# EAGLE board new_encorder_slave_ver_adachi_80x50 (EAGLE 6.4)
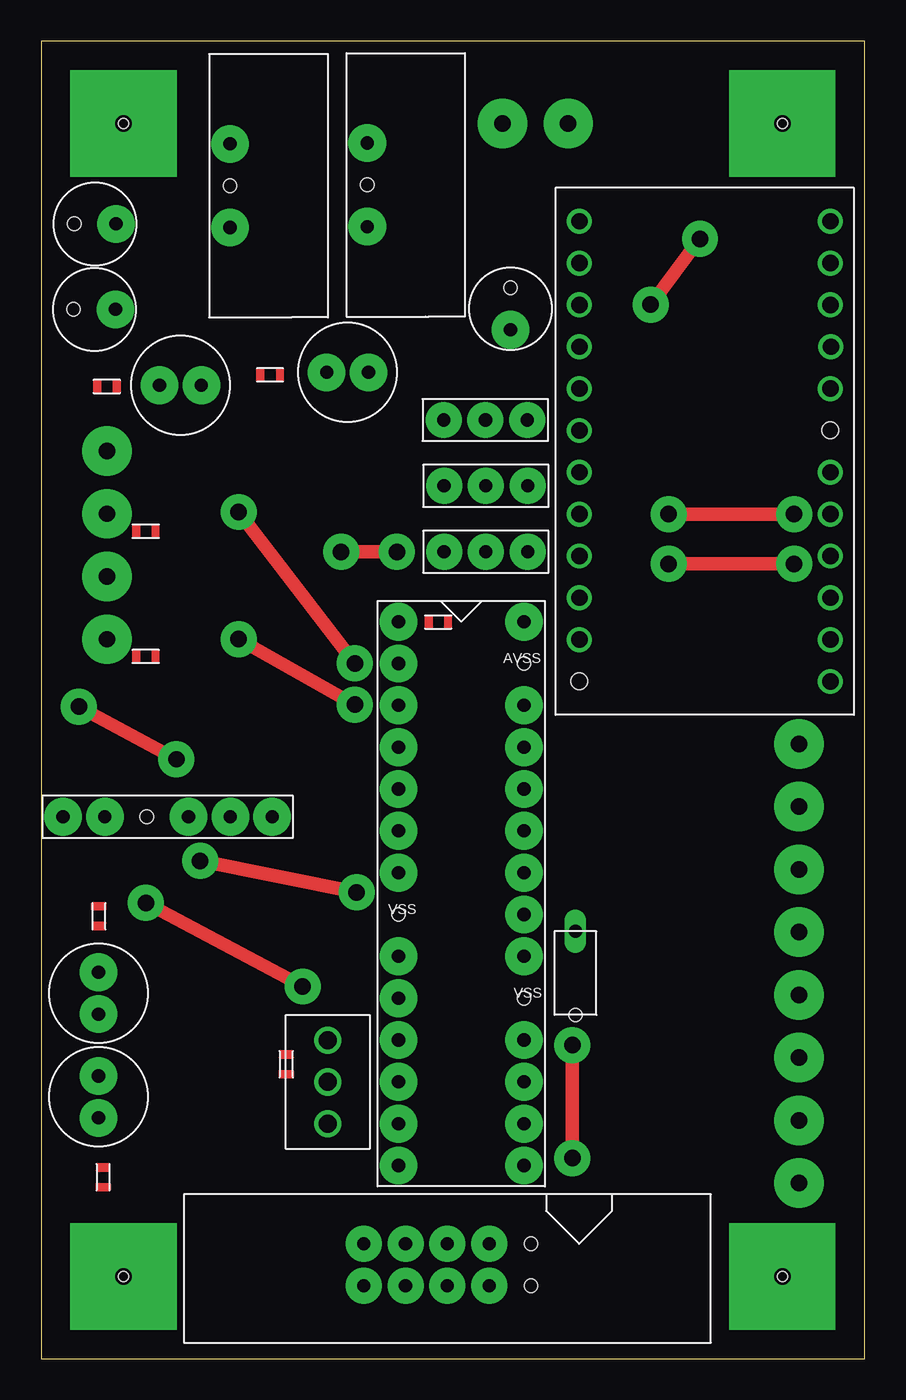
[diagram p0: board, top side]
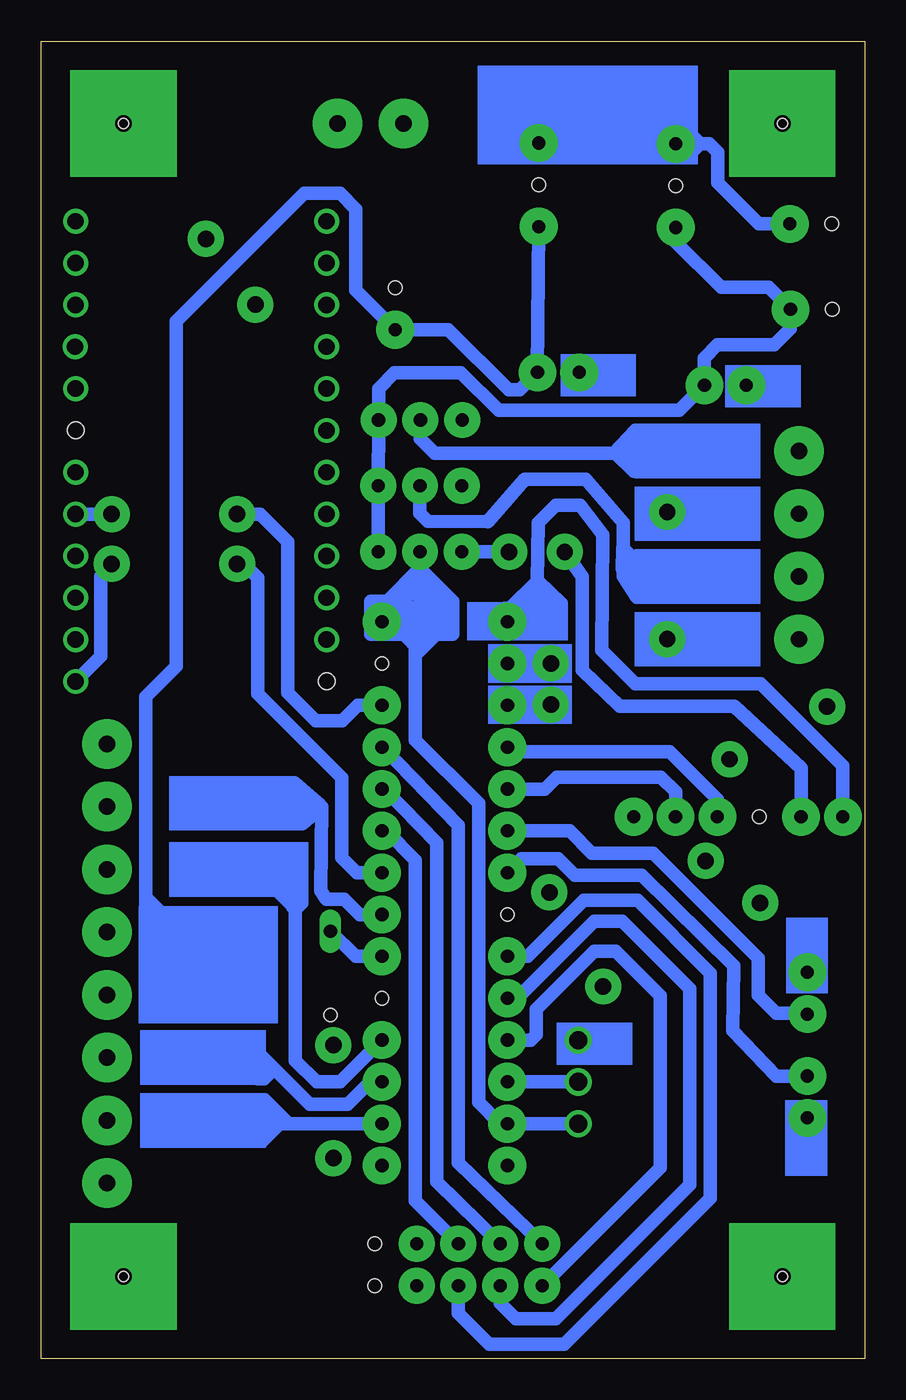
[diagram p1: board, bottom side, seen from below]

Size 50 x 80 mm. Coordinates in mm from the lower left corner, seen from the top.
Outline: 0,0 50,0 50,80 0,80 0,0
Copper layers (1*16): Top 0.035mm / dielectric 1.5mm / Bottom 0.035mm
Design rules "default": minimum track width 10mil, minimum drill 24mil, track to track 8mil, track to pad 8mil, pad to pad 8mil, via to via 8mil, smd to smd 8mil, copper to edge 40mil, drill to drill 8mil, minimum pad ring 10mil, minimum via ring 8mil, stop-mask expansion 4mil, vias tented up to drill 0mil, thermal gap 10mil
Holes 0.6 mm at 5,5 45,5 45,75 5,75

## Footprints (pad centres in the part's own frame; a part is rotated, then mirrored left to right if it is on the bottom)
PIC_28P_2 = drill 0.8 pad 2.3: AVDD 3.81,16.51; MCLR -3.81,16.51; RA0 -3.81,13.97; RA1 -3.81,11.43; RA2 -3.81,-3.81; RA3 -3.81,-6.35; RA4 -3.81,-8.89; RB0 -3.81,8.89; RB1 -3.81,6.35; RB2 -3.81,3.81; RB3 -3.81,1.27; RB4 -3.81,-11.43; RB5 -3.81,-16.51; RB6 3.81,-16.51; RB7 3.81,-13.97; RB8 3.81,-11.43; RB9 3.81,-8.89; RB10 3.81,-1.27; RB11 3.81,1.27; RB12 3.81,3.81; RB13 3.81,6.35; RB14 3.81,8.89; RB15 3.81,11.43; VCAP 3.81,-3.81; VDD -3.81,-13.97 | hole 0.8: -3.81,-1.27; 3.81,-6.35; 3.81,13.97
LED = drill 0.8 pad 2.286: P$1 -1.27,0; P$2 1.27,0
TOGGLE_SWITCH(3PIN) = drill 1.1: P$1 2.54,1.52; P$2 2.54,4.06; P$3 2.54,6.6
AE-UM232R = drill 1: 3LD 16.67,2.03; 3V3 16.67,17.27; CB0 16.67,27.43; CB1 16.67,24.89; CB2 1.43,2.03; CB3 16.67,14.73; CB4 1.43,4.57; CTS# 1.43,7.11; DCD# 1.4,9.65; DSR# 1.43,12.19; DTR# 1.43,27.43; PU1 16.67,12.19; PU2 16.67,9.65; RI# 1.43,17.27; RST 16.67,19.81; RTS# 1.43,24.89; RXD 1.43,19.81; TXD 1.43,29.97; USB 16.67,4.57; VCC 16.67,22.35; VCCC 16.67,7.11; VIO 1.43,22.35 | hole 1: 1.43,14.73; 16.67,29.97
RIBBON_CABLE = drill 0.8 pad 2.184: P$1 -5.08,0; P$2 -2.54,0; P$3 0,0; P$4 2.54,0; P$5 -5.08,-2.54; P$6 -2.54,-2.54; P$7 0,-2.54; P$8 2.54,-2.54 | hole 0.8: 5.08,0; 5.08,-2.54
REGULATOR = drill 0.8 pad 2.286: P$2 -2.54,1.27; P$3 2.54,1.27 | hole 0.8: 0,1.27
WRITER = drill 0.8 pad 2.286: P$1 -6.35,0; P$2 -3.81,0; P$4 1.27,0; P$5 3.81,0; P$6 6.35,0 | hole 0.8: -1.27,0
CAPACITOR_33 = drill 0.8 pad 2.286: P$1 -1.27,0 | hole 0.8: 1.27,0
CAPACITORS_106 = drill 0.8 long: P$2 -2.54,0 | hole 0.8: 2.54,0
3PINSWITCH = drill 0.8 pad 2.184: P$1 -2.54,0; P$2 0,0; P$3 2.54,0

## Placement (x,y rotation side)
DSPIC33FJ128MC1  DSPIC33FJ128MC  [PIC_28P_2]  25.5,28.24 0 top
U$1  LED  [LED]  18.6,59.89 0 top
U$2  LED  [LED]  3.48,22.2 270 top
U$3  LED  [LED]  3.48,15.9 90 top
U$4  LED  [LED]  8.46,59.11 180 top
U$5  CHIP_RESISTOR  [CHIP_RESISTOR]  14.88,17.88 90 top
U$6  TOGGLE_SWITCH(3PIN)  [TOGGLE_SWITCH(3PIN)]  14.86,12.75 0 top
U$7  AE-UM232R  [AE-UM232R]  49.34,71.1 180 top
U$8  RIBBON_CABLE  [RIBBON_CABLE]  24.66,6.99 0 top
U$9  REGULATOR  [REGULATOR]  10.2,71.23 270 top
U$10  REGULATOR  [REGULATOR]  18.52,71.28 270 top
U$11  WRITER  [WRITER]  7.67,32.91 0 top
U$12  CAPACITOR_33  [CAPACITOR_33]  3.24,63.72 180 top
U$13  CAPACITOR_33  [CAPACITOR_33]  28.5,63.75 90 top
U$14  CAPACITOR_33  [CAPACITOR_33]  3.28,68.91 180 top
U$15  CAPACITORS_106  [CAPACITORS_106]  32.44,23.42 270 top
U$16  CHIP_RESISTOR  [CHIP_RESISTOR]  13.89,59.74 0 top
U$17  CHIP_RESISTOR  [CHIP_RESISTOR]  6.35,42.65 0 top
U$18  CHIP_RESISTOR  [CHIP_RESISTOR]  3.99,59.03 0 top
U$19  CHIP_RESISTOR  [CHIP_RESISTOR]  24.1,44.73 0 top
U$20  CHIP_RESISTOR  [CHIP_RESISTOR]  6.35,50.24 0 top
U$21  CHIP_RESISTOR  [CHIP_RESISTOR]  3.51,26.87 270 top
U$23  CHIP_RESISTOR  [CHIP_RESISTOR]  3.76,11.02 90 top
U$24  3PINSWITCH  [3PINSWITCH]  27,49 0 top
U$25  3PINSWITCH  [3PINSWITCH]  27,53 0 top
U$26  3PINSWITCH  [3PINSWITCH]  26.97,57 0 top

## Library data of the parts
DSPIC33FJ128MC1 = N_MicroComputer
U$1-U$5 U$8-U$21 U$23-U$26 = oohira_new
U$6 U$7 = inogu

## Nets
S$1: DSPIC33FJ128MC1.RB9
S$2: DSPIC33FJ128MC1.RB4 U$6.P$2
S$3: DSPIC33FJ128MC1.RB10
S$4: DSPIC33FJ128MC1.RB13 U$8.P$2
S$6: U$25.P$2
S$7: DSPIC33FJ128MC1.RB14 U$8.P$1
S$8: DSPIC33FJ128MC1.RB7
S$9: DSPIC33FJ128MC1.RA3 U$8.P$6
S$10: DSPIC33FJ128MC1.RA2 U$8.P$7
S$12: DSPIC33FJ128MC1.RA4 U$8.P$5
S$13: DSPIC33FJ128MC1.RB3 U$3.P$2
S$19: DSPIC33FJ128MC1.RB2 U$2.P$2
S$22: DSPIC33FJ128MC1.RB1 U$11.P$5
S$23: DSPIC33FJ128MC1.RB0 U$11.P$4
S$24: U$11.P$2
S$26: DSPIC33FJ128MC1.MCLR U$11.P$1
S$27: U$26.P$2
S$28: U$1.P$2 U$10.P$3 U$13.P$1
S$29: DSPIC33FJ128MC1.RB15
S$30: DSPIC33FJ128MC1.RB12 U$8.P$3
S$31: DSPIC33FJ128MC1.RB8
S$33: DSPIC33FJ128MC1.VCAP U$15.P$2
S$34: DSPIC33FJ128MC1.RB11
S$36: U$7.RXD
S$41: U$4.P$1 U$9.P$3 U$12.P$1 U$24.P$3 U$25.P$3 U$26.P$3
S$51: U$24.P$1
S$56: U$9.P$2 U$14.P$1
S$64: U$7.TXD
S$81: DSPIC33FJ128MC1.AVDD DSPIC33FJ128MC1.VDD U$6.P$1 U$24.P$2

## Tracks (layer width: path | path; a pad name or v marks a point on that pad's centre or on a via)
S$1
  Bottom 0.813: DSPIC33FJ128MC1.RB9 31.85,16.82 33.27,16.82 34.57,18.11 34.57,27.28 34.19,27.66 34.19,28.3 34.34,28.45 35.69,28.45 34.67,27.43 34.67,27.38 34.72,27.43 34.72,28.22
S$2
  Bottom 0.813: U$6.P$2 DSPIC33FJ128MC1.RB4
S$3
  Bottom 0.813: 34.54,34.06 34.24,33.76 33.96,33.76 34.75,32.97 34.85,32.97 34.75,33.07 32.97,33.53 | 32.97,33.53 33.07,33.6 34.65,34.98 34.8,32.66 34.57,32.49 34.14,32.49 32.97,33.53 | 32.97,33.53 33.02,28.42 32.69,27.91 31.6,27.91 30.66,26.98 DSPIC33FJ128MC1.RB10
S$4
  Bottom 0.813: U$8.P$2 25.98,10.74 25.98,31.34 29.13,34.59 DSPIC33FJ128MC1.RB13
S$5  (via drill 1 pad 3)
  other vias: 46,18.29
S$6
  Bottom 0.813: U$25.P$2 27,51.33 26.52,50.85 22.89,50.83 20.65,53.42 16.94,53.39 14.66,50.75 14.66,47.52 13.84,46.25 13.84,48.44 14.68,49.25 14.71,47.98 14.07,47.47 14.07,47.8 14.58,48.31
S$7
  Bottom 0.813: U$8.P$1 24.69,11.91 24.69,32.38 29.26,37.13 DSPIC33FJ128MC1.RB14
S$8
  Bottom 0.813: 36.58,15.04 36.58,15.57 36.42,15.72 34.98,14.28 | 36.58,15.04 35.81,14.28 35.51,14.28 | 36.58,15.04 36.58,13.21 35.51,14.28 | 35.51,14.28 34.98,14.28 | DSPIC33FJ128MC1.RB7 34.98,14.28
S$9
  Bottom 0.813: U$8.P$6 22.12,3.38 21.18,2.44 18.75,2.44 10.62,10.57 10.62,22.45 14.73,26.57 16.43,26.57 21.13,21.87 21.67,21.87 DSPIC33FJ128MC1.RA3
S$10
  Bottom 0.813: DSPIC33FJ128MC1.RA2 20.45,24.43 17.04,27.84 13.79,27.84 9.37,23.42 9.37,9.75 18.24,0.89 22.81,0.89 24.69,2.77 24.69,4.42 U$8.P$7
S$12
  Bottom 0.813: DSPIC33FJ128MC1.RA4 20.27,19.36 19.94,19.68 19.94,21.23 16.43,24.74 15.11,24.74 12.42,22.05 12.42,11.61 U$8.P$5
S$13
  Bottom 0.813: U$3.P$2 5.36,17.17 8,19.91 7.95,23.85 13.54,29.36 17.6,29.36 18.59,30.35 20.85,30.35 DSPIC33FJ128MC1.RB3
S$15  (via drill 1 pad 6.45)
  other vias: 5,75
S$16  (via drill 1 pad 6.45)
  other vias: 45,75
S$17  (via drill 1 pad 6.45)
  other vias: 5,5
S$18  (via drill 1 pad 6.45)
  other vias: 45,5
S$19
  Bottom 0.813: DSPIC33FJ128MC1.RB2 17.91,32.05 16.56,30.71 12.83,30.71 6.45,24.33 6.45,22.07 5.36,20.98 3.53,20.98 U$2.P$2
S$20  (via drill 1 pad 3)
  other vias: 28,75
S$21  (via drill 1 pad 3)
  other vias: 32,75
S$22
  Bottom 0.813: U$11.P$5 11.48,34.42 12.37,35.31 18.69,35.31 19.43,34.57 21.67,34.57 DSPIC33FJ128MC1.RB1
S$23
  Bottom 0.813: U$11.P$4 8.95,33.96 11.84,36.85 21.41,36.85 DSPIC33FJ128MC1.RB0
S$24
  Bottom 0.813: 18.21,49 17.14,47.5 17.14,41.81 14.88,39.62 7.92,39.62 3.87,35.87 U$11.P$2
S$26
  Bottom 0.813: U$11.P$1 1.32,36 6.33,41 13.92,41 15.95,43.03 15.9,50.04 17.27,51.82 18.75,51.82 19.81,50.77 19.89,47.19 19,46.35 19,45.64 19.76,46.41 19.91,46.41 20.75,45.57 21.54,45.57 | DSPIC33FJ128MC1.MCLR 18.92,44.76 18.41,45.26 18.41,45.87 19.86,47.24 21.54,45.57 | 21.54,45.57 21.87,45.57
S$27
  Bottom 0.813: U$26.P$2 26.98,55.85 26.11,54.99 15.24,54.99 13.92,56.36 13.69,56.13 13.69,53.9 13.72,53.87 14.02,53.87 15.11,54.97 15.14,54.97 14.68,55.42 14.05,55.42 14.33,55.14 14.33,54.74
S$28
  Bottom 0.813: U$10.P$3 U$1.P$2 20.94,58.83 21.61,58.83 25.27,62.48 U$13.P$1 30.89,64.87 30.89,69.8 31.85,70.76 34.04,70.76 41.81,62.99 41.81,42.06 43.66,40.21 43.66,28.02 | 43.66,28.02 43.66,25.35 42.75,26.26 42.75,27.1 43.66,28.02
S$29
  Bottom 0.813: DSPIC33FJ128MC1.RB15 30.79,39.67 31.73,38.73 33.33,38.73 35.03,40.44 35.03,49.61 36.7,51.29 38.1,51.29
S$30
  Bottom 0.813: U$8.P$3 27.28,9.6 27.28,30.28 29.06,32.05 DSPIC33FJ128MC1.RB12
S$31
  Bottom 0.813: 35.92,17.55 36.45,17.02 36.88,17.02 36.88,18.47 36.8,18.54 33.71,15.44 31.39,15.44 30.02,16.82 DSPIC33FJ128MC1.RB8
S$32
  Top 0.813: 32.26,12.19 32.26,19.05
S$33
  Bottom 0.813: DSPIC33FJ128MC1.VCAP 30.91,24.43 U$15.P$2
S$34
  Bottom 0.813: DSPIC33FJ128MC1.RB11 30.84,29.52 31.75,30.43 31.75,35.28 36.85,40.39 36.85,47.42 37.69,48.26 38.1,48.26
S$35  (via drill 1 pad 2.18)
  other vias: 45.72,48.26
S$36
  Bottom 0.813: U$7.RXD 45.72,51.29
S$38  (via drill 1 pad 2.18)
  other vias: 32.26,19.05
S$39  (via drill 1 pad 2.18)
  other vias: 38.1,51.29
S$40  (via drill 1 pad 2.18)
  other vias: 38.1,48.26
S$41
  Bottom 0.813: U$24.P$3 U$25.P$3 U$26.P$3 29.52,58.9 28.55,59.87 24.51,59.87 22.23,57.58 11.25,57.58 U$4.P$1 9.75,60.76 8.94,61.57 5.49,61.57 4.51,62.55 U$12.P$1 5.84,65.05 8.71,65.05 11.47,67.81 U$9.P$3
S$42  (via drill 1 pad 3)
  other vias: 46,10.67
S$43  (via drill 1 pad 3)
  other vias: 46,37.34
S$44  (via drill 1 pad 3)
  other vias: 46,33.53
S$45  (via drill 1 pad 3)
  other vias: 46,29.72
S$46  (via drill 1 pad 3)
  other vias: 46,25.91
S$47  (via drill 1 pad 3)
  other vias: 46,22.1
S$48  (via drill 1 pad 3)
  other vias: 46,14.48
S$49
  Top 0.813: 11.99,51.41 19.05,42.22
S$50
  Top 0.813: 19.05,39.73 11.99,43.69
S$51
  Bottom 0.813: U$24.P$1 21.59,49
S$52  (via drill 1 pad 3)
  other vias: 4,43.69
S$53  (via drill 1 pad 3)
  other vias: 4,47.5
S$54  (via drill 1 pad 3)
  other vias: 4,51.31
S$55  (via drill 1 pad 3)
  other vias: 4,55.12
S$56
  Bottom 0.813: U$14.P$1 6.43,68.91 8.91,71.4 8.91,73.25 9.45,73.79 11.45,73.79 U$9.P$2 11.47,73.65 10.69,72.92 10.67,73.08 10.16,73.58 10.16,73.74 10.08,73.81 10.08,73.86 10.82,74.6
S$57
  Top 0.813: 9.65,30.23 19.15,28.32
S$58
  Top 0.813: 2.29,39.6 8.2,36.4
S$59
  Top 0.813: 6.35,27.69 15.88,22.61
S$60
  Top 0.813: 18.21,49 21.59,49
S$61
  Top 0.813: 37,64 40,68
S$62  (via drill 1 pad 2.18)
  other vias: 45.72,51.29
S$63  (via drill 1 pad 2.18)
  other vias: 40,68
S$64
  Bottom 0.813: U$7.TXD 46.38,42.66 46.38,47.52 45.72,48.26
S$65
  Top 0.813: 38.1,48.26 45.72,48.26
S$66
  Top 0.813: 45.72,51.29 38.1,51.29
S$67  (via drill 1 pad 2.18)
  other vias: 11.99,51.41
S$68  (via drill 1 pad 2.18)
  other vias: 21.59,49
S$69  (via drill 1 pad 2.18)
  other vias: 18.21,49
S$70  (via drill 1 pad 2.18)
  other vias: 19.05,42.22
S$71  (via drill 1 pad 2.18)
  other vias: 19.05,39.73
S$72  (via drill 1 pad 2.18)
  other vias: 11.99,43.69
S$73  (via drill 1 pad 2.18)
  other vias: 2.29,39.6
S$74  (via drill 1 pad 2.18)
  other vias: 8.2,36.4
S$75  (via drill 1 pad 2.18)
  other vias: 6.35,27.69
S$76  (via drill 1 pad 2.18)
  other vias: 9.65,30.23
S$77  (via drill 1 pad 2.18)
  other vias: 19.15,28.32
S$78  (via drill 1 pad 2.18)
  other vias: 32.26,12.19
S$79  (via drill 1 pad 2.18)
  other vias: 15.88,22.61
S$80  (via drill 1 pad 2.18)
  other vias: 37,64
S$81
  Bottom 0.813: U$6.P$1 DSPIC33FJ128MC1.VDD 22.15,14.28 23.44,15.57 23.44,33.73 27.28,37.57 27.28,45.28 28,46 28,44 | U$24.P$2 27,48 | 27,48 25,46 25,44 | 25,44 26,44 | 26,44 28,44 | 27,48 29,46 30,46 30,44 29,44 28,44 | 27,48 27,47.07 DSPIC33FJ128MC1.AVDD | 26,44 27,45 27,47 26,46 | 26,45 25,44 | 26,44 27,43 28,44
  Bottom 1.27: 26,46 26,45
(copper drawn outside any net)
  shapes: Bottom area x18